# Altium PCB V_5.PcbDoc
Units mm, origin at the board's own origin, x right, y up, seen from the top; angles counter-clockwise.
Board outline 152.4 x 101.6 mm, 2 copper layers (Top Layer, Bottom Layer); 6 components, 9 nets, 74 pads, 11 vias.
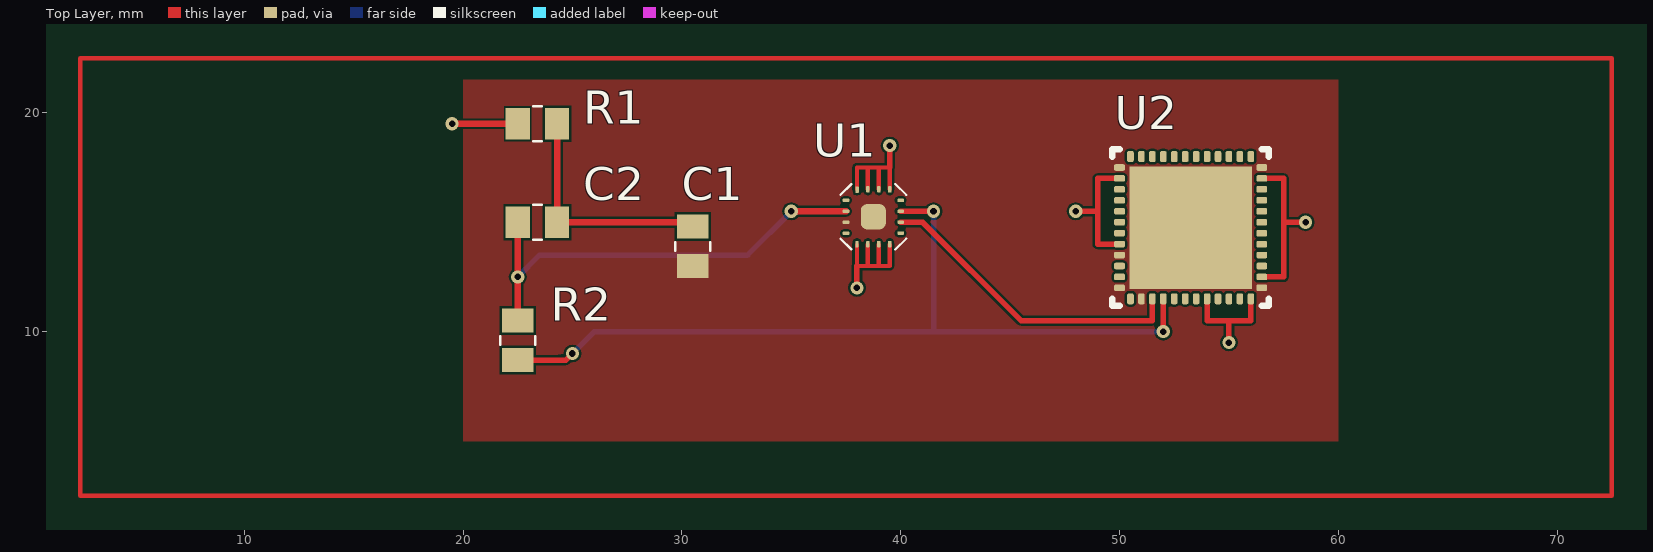
[diagram p0: Top Layer view]
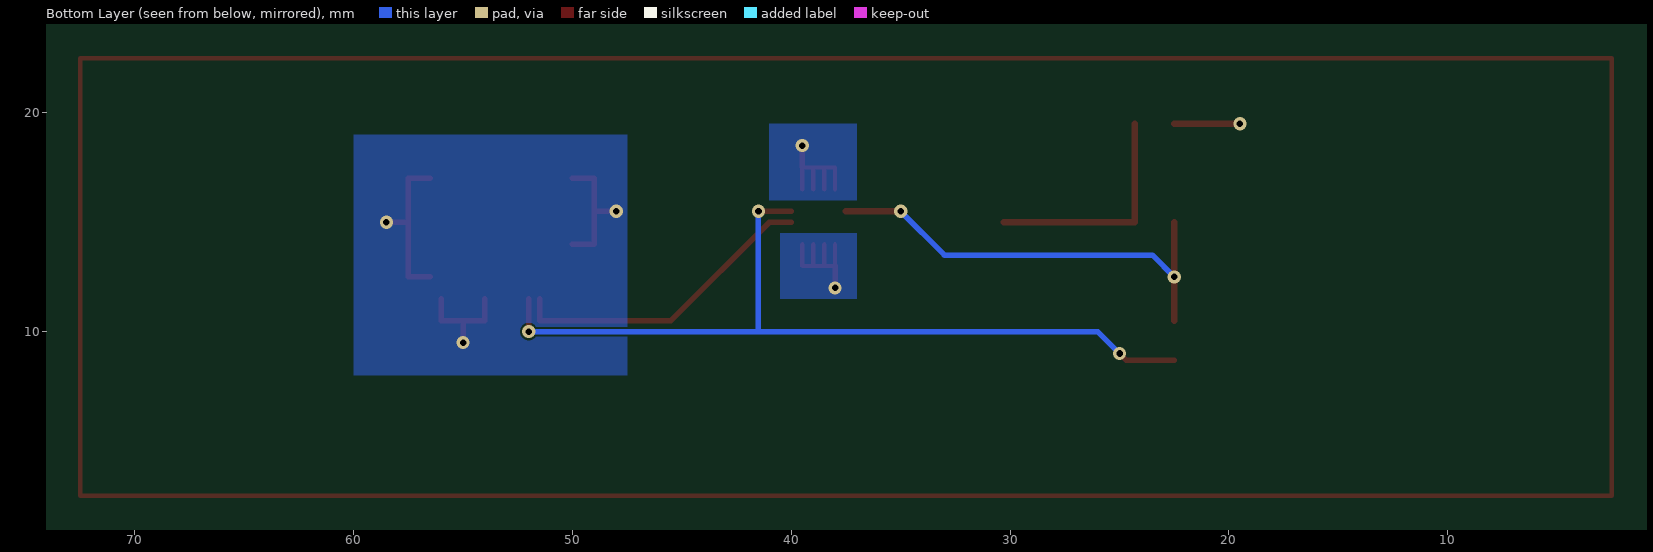
[diagram p1: Bottom Layer view, seen from below]

## Layer stack, top to bottom
Top Layer: signal copper 0.0356
Dielectric: dielectric 0.32, FR-4, Dk 4.8
Bottom Layer: signal copper 0.0356

## Board outline
-0.635,-1.27 151.765,-1.27 151.765,100.33 -0.635,100.33

## Design rules (kind name [scope] priority, off if disabled: settings)
Clearance [All] p1: gap=0.1
HoleToHoleClearance [All] p1: gap=0.1 allowstackedmicrovias=TRUE
MinimumSolderMaskSliver [All] p1: minsoldermaskwidth=0
PlaneConnect [All] p1: planeconnectstyle=Direct reliefexpansion=0.508 reliefentries=4 reliefconductorwidth=0.254 reliefairgap=0.254
PolygonConnect [All] p1: connectstyle=Direct reliefconductorwidth=0.254 reliefentries=4 polygonreliefangle="90 Angle" airgapwidth=0.254
RoutingVias [All] p1: holewidth=0.711 width=1.27 viastyle="Through Hole" minholewidth=0.711 minwidth=1.27 maxholewidth=0.711 maxwidth=1.27
SilkToSilkClearance [All] p1: silktosilkclearance=0.1
SilkscreenOverComponentPads [All] p1: minsilkscreentomaskgap=0.1
SolderMaskExpansion [All] p1: expansion=0.102
Width [All] p1: maxlimit=1 minlimit=0.2 preferedwidth=0.5
23 further rules are at their usual default settings.

## Components (designator, comment, footprint, x,y, rotation, side; value= is the part's Value field where it differs from the comment)
C1 "2p2" Capacitor 30.5,13 r90 top
C2 "2p2" Capacitor 22.5,15 r0 top
R1 "6K8" Resistor 22.5,19.5 r0 top
R2 "2K2" Resistor 22.5,10.5 r270 top
U1 "ADA4932" ADA4932 37.5,16 r0 top
U2 "ADS61B" ADS61B49 50,17.5 r0 top

## Footprints (in the part's own frame and the unit in brackets; to place one, negate y for a bottom-side part, rotate by r counter-clockwise, add the part's x,y. Pads: shape width x height; smd on the part's side, far side on the other; paste and mask are expansions set on the pad)
ADA4932 [mm]
  rrect50% 0.3x0.15 smd: 1(0,0) 2(0,-0.5) 3(0,-1) 4(0,-1.5) 9(2.5,-1.5) 10(2.5,-1) 11(2.5,-0.5) 12(2.5,0)
  rrect50% 0.15x0.3 smd: 5(0.5,-2) 6(1,-2) 7(1.5,-2) 8(2,-2) 13(2,0.5) 14(1.5,0.5) 15(1,0.5) 16(0.508,0.483)
  rrect50% 1.15x1.15 smd: 17(1.25,-0.75)
  silkscreen extent -0.25,-2.25 2.75,0.75
ADS61B49 [mm]
  rrect50% 0.5x0.3 smd: 1(0,0) 2(0,-0.5) 3(0,-1) 4(0,-1.5) 5(0,-2) 6(0,-2.5) 7(0,-3) 8(0,-3.5) 9(0,-4) 10(0,-4.5) 11(0,-5) 12(0,-5.5) 25(6.5,-5.5) 26(6.5,-5) 27(6.5,-4.5) 28(6.5,-4) 29(6.5,-3.5) 30(6.5,-3) 31(6.5,-2.5) 32(6.5,-2) 33(6.5,-1.5) 34(6.5,-1) 35(6.5,-0.5) 36(6.5,0)
  rrect50% 0.3x0.5 smd: 13(0.5,-6) 14(1,-6) 15(1.5,-6) 16(2,-6) 17(2.5,-6) 18(3,-6) 19(3.5,-6) 20(4,-6) 21(4.5,-6) 22(5,-6) 23(5.5,-6) 24(6,-6) 37(6,0.5) 38(5.5,0.5) 39(5,0.5) 40(4.5,0.5) 41(4,0.5) 42(3.5,0.5) 43(3,0.5) 44(2.5,0.5) 45(2,0.5) 46(1.5,0.5) 47(1,0.5) 48(0.5,0.5)
  rect 5.6x5.6 smd: 49(3.25,-2.75)
  silkscreen extent -0.32,-6.32 6.83,0.82
Capacitor [mm]
  rect 1.1x1.45 smd: 1(0,0) 2(1.8,0)
  silkscreen extent 0.7,-0.8 1.1,0.8
Resistor [mm]
  rect 1.1x1.45 smd: 1(0,0) 2(1.8,0)
  silkscreen extent 0.7,-0.8 1.1,0.8

## Part data
C1 C2: library part Cap
R1 R2: library part Res
U2: library part ADS61B49

## Via types
v1: diameter 0.6, hole 0.3, Top Layer to Bottom Layer, 11 vias

## Nets (pads, with @x,y where several pads share a name; then routed paths per layer and width w, separated by ;. In a path a pad name is that pad's centre, name@x,y a point inside that pad or via, vN(x,y) a via of type N, cw(c..) or ccw(c..) an arc to the next point about the centre after c; other vN are vias at no path point)
3.3V: U2.2 U2.8 U2.20 U2.24 U2.26 U2.35 | length 18.5
  Top Layer w0.254: v1(48,15.5) 49,15.5 ; U2.8 49,14 49,15.5 ; U2.2 49,17 49,15.5 ; U2.20 54,10.5 55,10.5 ; v1(55,9.5) 55,10.5 ; U2.24 56,10.5 55,10.5 ; U2.26 57.5,12.5 57.5,15 ; U2.35 57.5,17 57.5,15 ; v1(58.5,15) 57.5,15
+5V: U1.5 U1.6 U1.7 U1.8 | length 6.5
  Top Layer w0.2: U1.5 38,13 38.5,13 ; U1.6 38.5,13 ; U1.7 39,13 ; U1.8 39.5,13 39,13 ; 38.5,13 39,13
  Top Layer w0.254: v1(38,12) 38,13
-5V: U1.13 U1.14 U1.15 U1.16 | length 6.5
  Top Layer w0.2: U1.16@38,16.5 38,17.5 38.5,17.5 ; U1.15 38.5,17.5 ; U1.14 39,17.5 ; U1.13 39.5,17.5 39,17.5 ; 38.5,17.5 39,17.5
  Top Layer w0.254: 39.5,17.5 v1(39.5,18.5)
GND: C1.1 U1.3 U1.17 U2.1 U2.9 U2.12 U2.14 U2.25 U2.36 U2.49
NetC1_2: C1.2 C2.2 R1.2 | length 10.5
  Top Layer w0.3: R1.2 C2.2 C1.2@30.3,15
NetC2_1: C2.1 R2.1 U1.2 | length 20.7
  Top Layer w0.3: R2.1 v1(22.5,12.5) C2.1 ; v1(35,15.5) U1.2
  Bottom Layer w0.254: v1(22.5,12.5) 23.5,13.5 33,13.5 v1(35,15.5)
NetR1_1: R1.1 | length 3
  Top Layer w0.3: v1(19.5,19.5) R1.1
NetR2_2: R2.2 U1.11 U2.16 | length 38.5
  Top Layer w0.254: R2.2 24.7,8.7 v1(25,9) ; U1.11 v1(41.5,15.5) ; v1(52,10) U2.16
  Bottom Layer w0.254: v1(25,9) 26,10 v1(52,10) ; 41.5,10 v1(41.5,15.5)
NetU1_10: U1.10 U2.15 | length 14.4
  Top Layer w0.254: U1.10 41,15 45.5,10.5 51.5,10.5 U2.15
pads on no net: U1.1 U1.4 U1.9 U1.12 U2.3 U2.4 U2.5 U2.6 U2.7 U2.10 U2.11 U2.13 U2.17 U2.18 U2.19 U2.21 U2.22 U2.23 U2.27 U2.28 U2.29 U2.30 U2.31 U2.32 U2.33 U2.34 U2.37 U2.38 U2.39 U2.40 U2.41 U2.42 U2.43 U2.44 U2.45 U2.46 U2.47 U2.48
copper on no net: | length 180
  Top Layer w0.2: 2.5,2.5 72.5,2.5 72.5,22.5 2.5,22.5 2.5,2.5

## Polygon pours and split planes (outlines as drawn)
GND on Top Layer "Top Layer-No Net" (solid, pour order 2): 20,21.5 20,5 60,5 60,21.5
3.3V on Bottom Layer "Top Layer-No Net" (solid, pour order 8): 47.5,19 47.5,8 60,8 60,19
+5V on Bottom Layer "Top Layer-No Net" (solid, pour order 6): 37,14.5 40.5,14.5 40.5,11.5 37,11.5
-5V on Bottom Layer "Top Layer-No Net" (solid, pour order 4): 37,19.5 37,16 38.5,16 41,16 41,19.5